# Altium PCB PCB1.PcbDoc
Units mm, origin at the board's own origin, x right, y up, seen from the top; angles counter-clockwise.
Board outline 97.28 x 102.87 mm, 2 copper layers (Top Layer, Bottom Layer); 66 components, 43 nets, 307 pads, 25 vias.
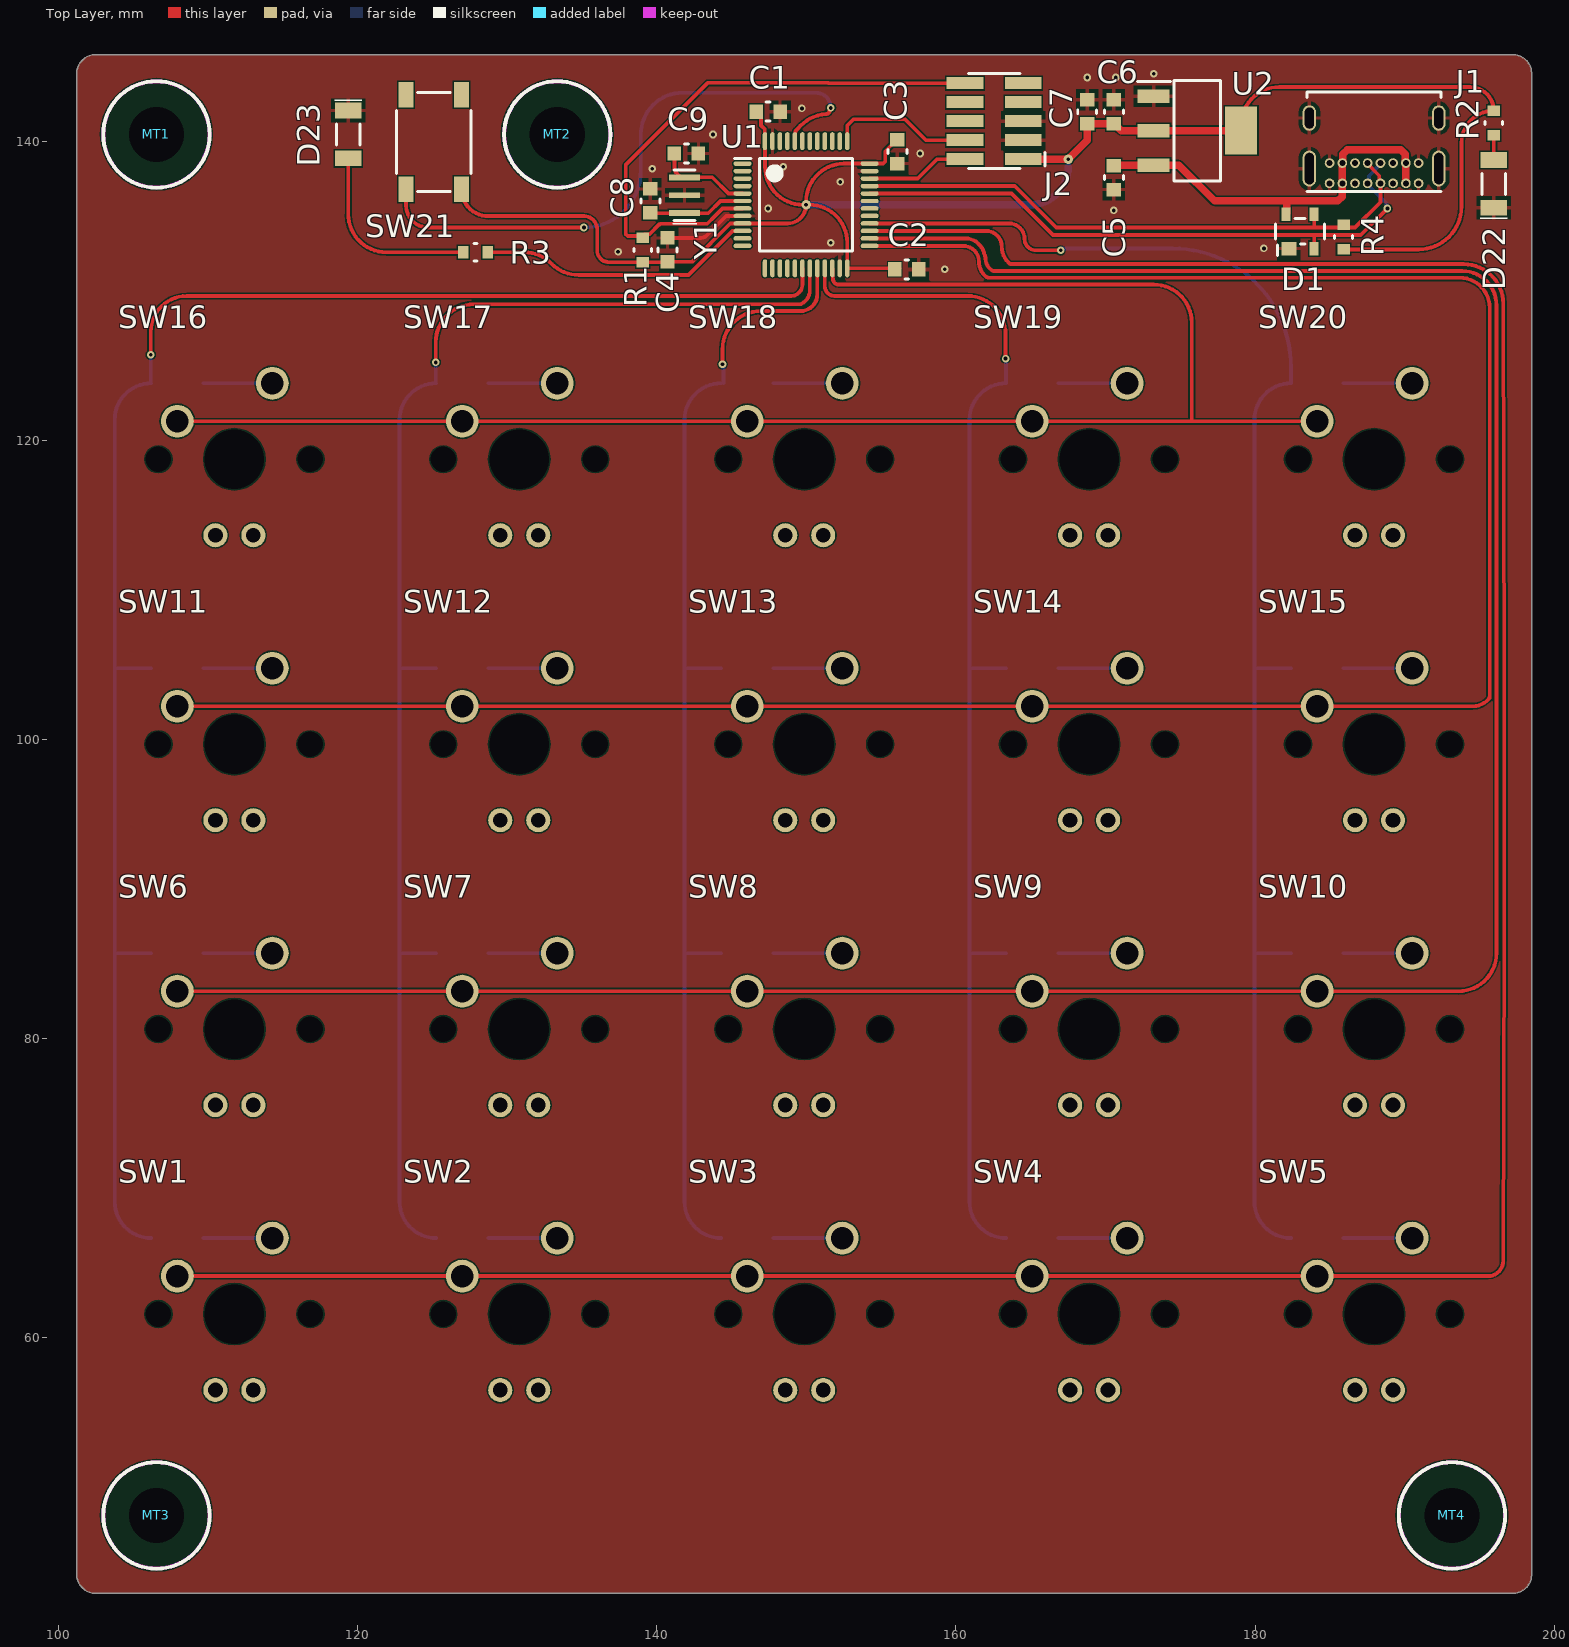
[diagram p0: Top Layer view]
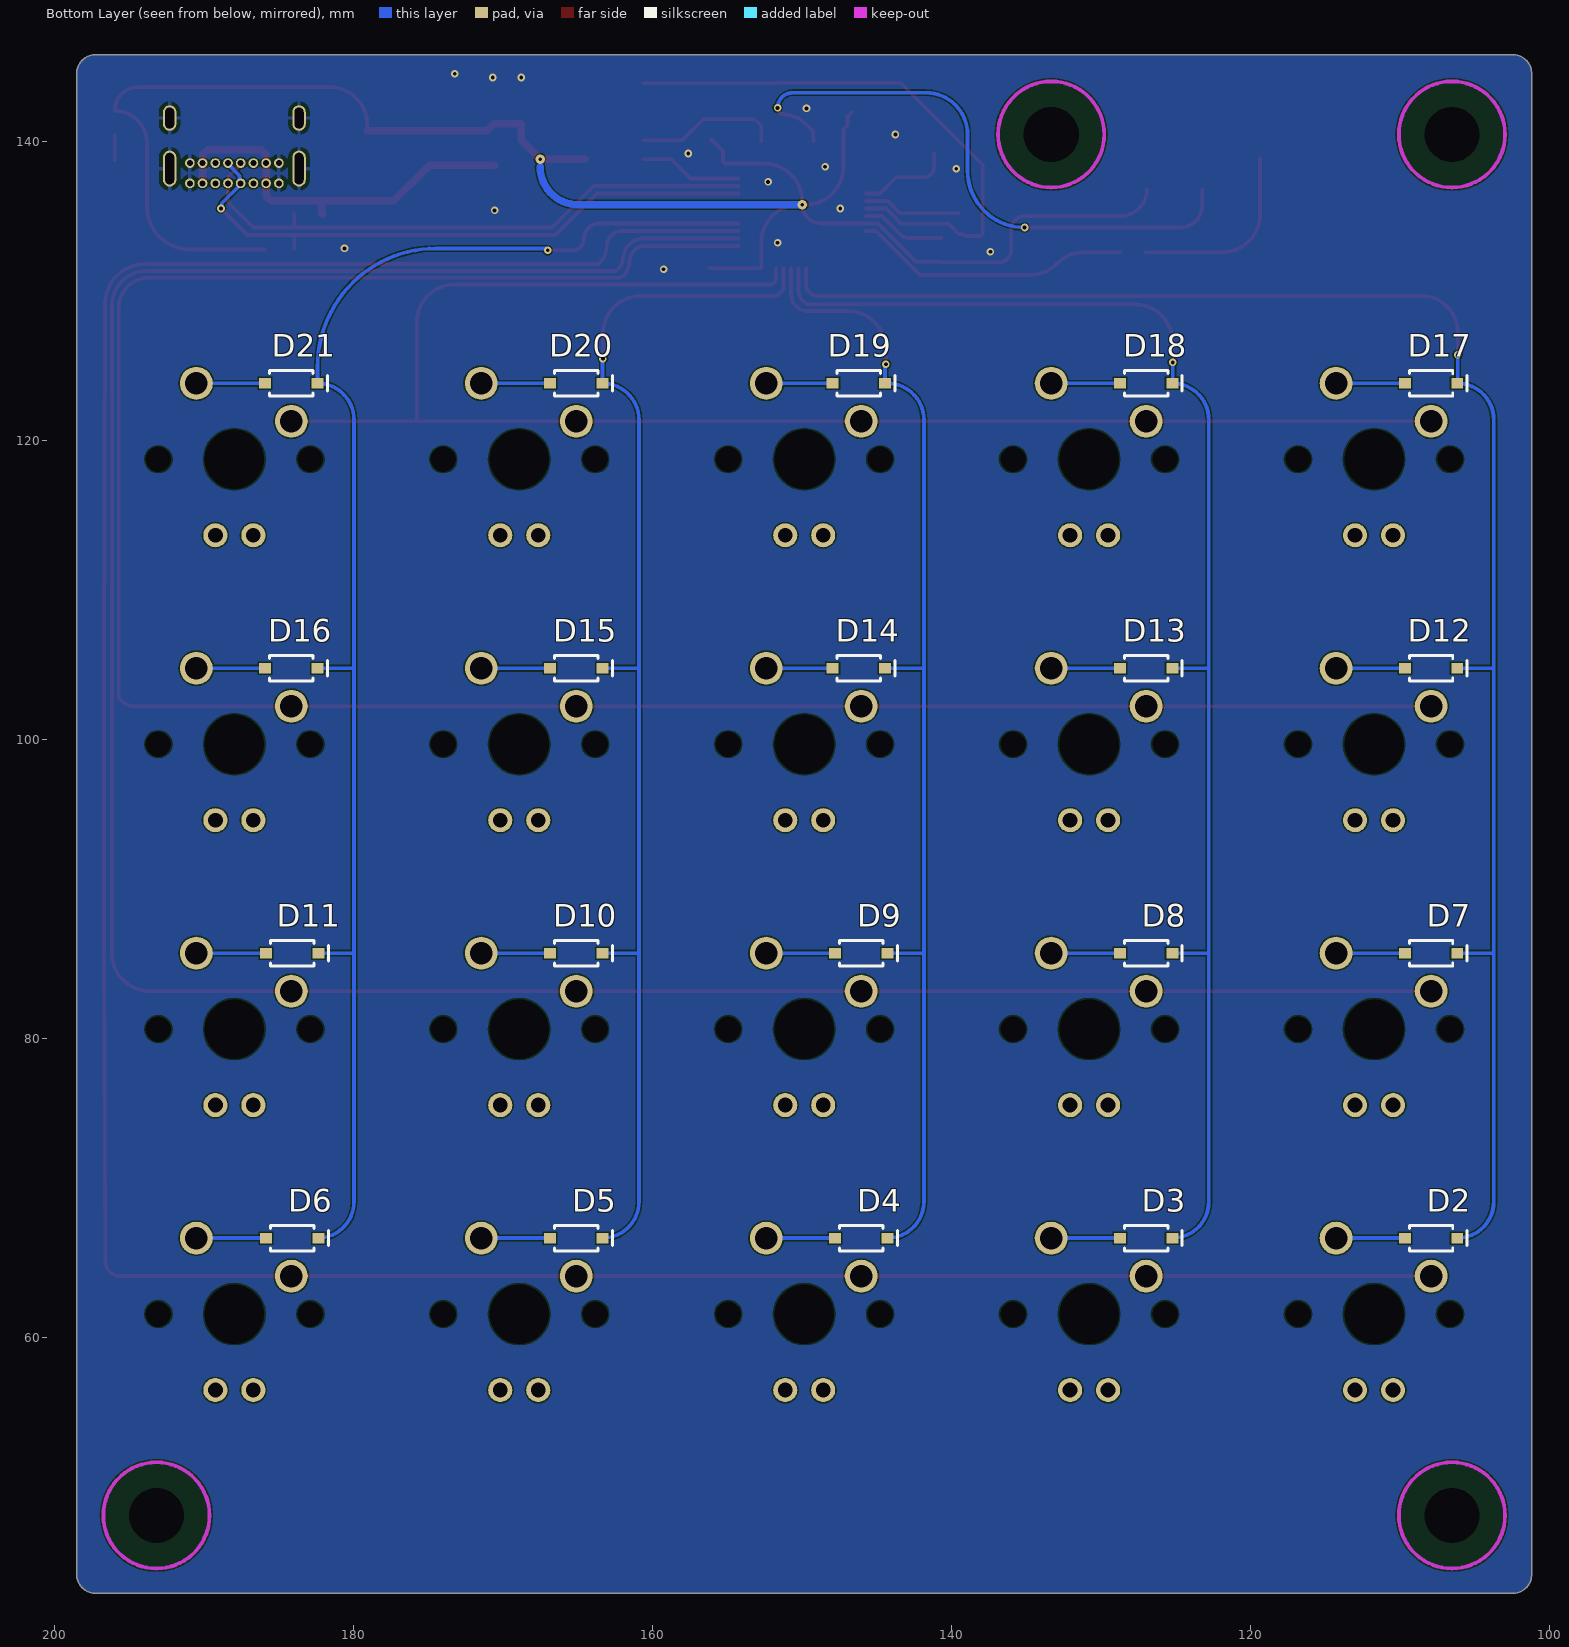
[diagram p1: Bottom Layer view, seen from below]
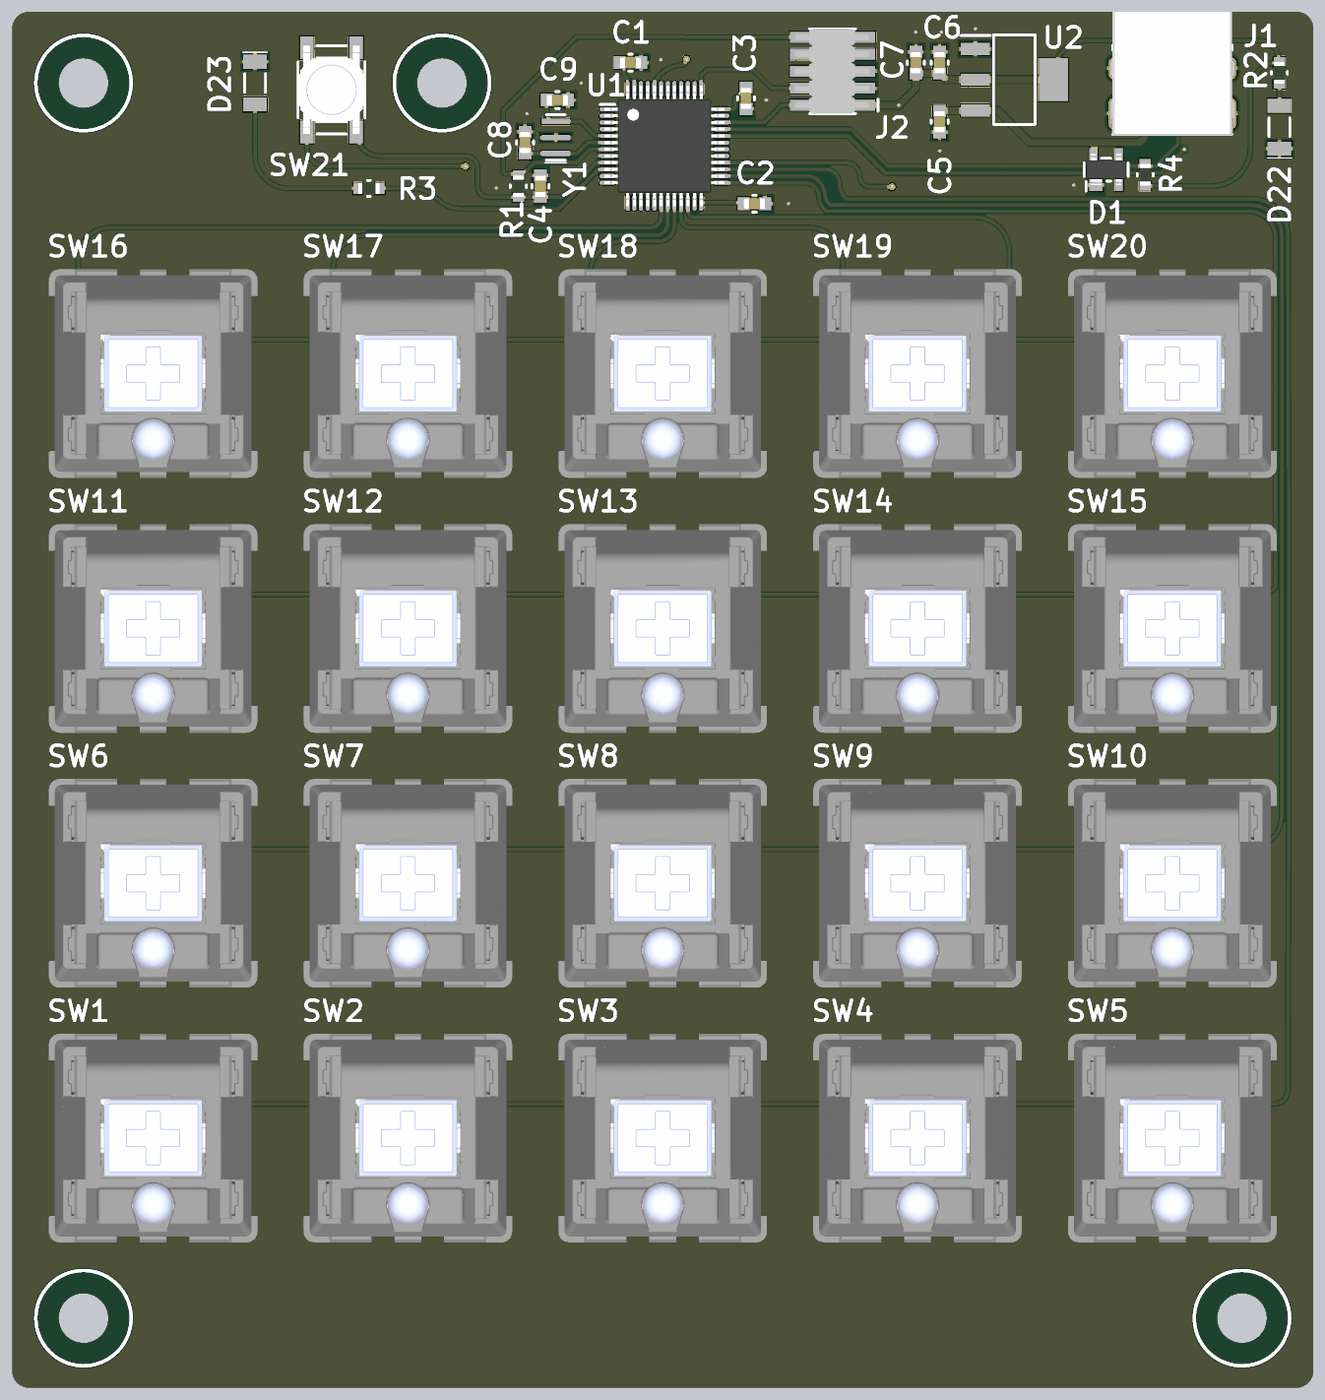
[diagram p2: 3D render of the assembled board from above, using the file's embedded part models]

## Layer stack, top to bottom
Top Solder: solder mask 0.0102, Solder Resist, Dk 3.5
Top Layer: signal copper 0.0356
Dielectric 1: dielectric 0.32, FR-4, Dk 4.8
Bottom Layer: signal copper 0.0356
Bottom Solder: solder mask 0.0102, Solder Resist, Dk 3.5

## Board outline
101.219,44.196 ccw(c102.489,44.196) 102.489,42.926 197.231,42.926 ccw(c197.231,44.196) 198.501,44.196 198.501,52.324 198.501,144.526 ccw(c197.231,144.526) 197.231,145.796 102.489,145.796 ccw(c102.489,144.526) 101.219,144.526 101.219,52.324

## Design rules (kind name [scope] priority, off if disabled: settings)
Clearance [All] p1: gap=0.089 ignorepadtopadclearanceinfootprint=FALSE
DiffPairsRouting [All] p1: maxlimit=0.254 minlimit=0.203 mostfreqgap=0.254 toplayer_minwidth=0.254 toplayer_maxwidth=0.381 toplayer_prefwidth=0.254 bottomlayer_minwidth=0.254 bottomlayer_maxwidth=0.381 bottomlayer_prefwidth=0.254 maxuncoupledlength=12.7
HoleSize [All] p1: absolutevalues=TRUE maxlimit=100 minlimit=0.2 maxpercent=80.000 minpercent=20.000
PolygonConnect PolygonConnect_Via [IsVia] p1: connectstyle=Direct reliefconductorwidth=0.254 reliefentries=4 polygonreliefangle="90 Angle" airgapwidth=0.254
PolygonConnect [All] p2: connectstyle=Relief reliefconductorwidth=0.254 reliefentries=4 polygonreliefangle="90 Angle" airgapwidth=0.254
RoutingVias [All] p1: holewidth=0.254 width=0.508 viastyle="Through Hole" minholewidth=0.254 minwidth=0.508 maxholewidth=0.254 maxwidth=0.508
SolderMaskExpansion [All] p1: expansion=0.102 istentingtop=FALSE
Width [All] p1: maxlimit=10 minlimit=0.089 preferedwidth=0.254
28 further rules are at their usual default settings.

## Classes and differential pairs
differential pair USBD: +USBD_P -USBD_N

## Components (designator, comment, footprint, x,y, rotation, side; value= is the part's Value field where it differs from the comment)
C1 "Generic CAPC 0603 0.1µF 25V ±10% X7R" CAPC_0603(1.6X0.8)_N 147.447,141.986 r0 top value=0.1µF
C2 "Generic CAPC 0603 0.1µF 25V ±10% X7R" CAPC_0603(1.6X0.8)_N 156.718,131.445 r0 top value=0.1µF
C3 "Generic CAPC 0603 0.1µF 25V ±10% X7R" CAPC_0603(1.6X0.8)_N 156.083,139.319 r270 top value=0.1µF
C4 "Generic CAPC 0603 0.1µF 25V ±10% X7R" CAPC_0603(1.6X0.8)_N 140.716,132.746 r90 top value=0.1µF
C5 "Generic CAPC 0603 0.1µF 25V ±10% X7R" CAPC_0603(1.6X0.8)_N 170.561,137.579 r270 top value=0.1µF
C6 "Generic CAPC 0603 0.1µF 25V ±10% X7R" CAPC_0603(1.6X0.8)_N 170.561,141.986 r90 top value=0.1µF
C7 "Generic CAPC 0603 10µF 6.3V ±20% X5R" CAPC_0603(1.6X0.8)_N 168.783,141.986 r90 top value=10µF
C8 "Generic CAPC 0603 22pF 250V ±2% C0G/NP0" CAPC_0603(1.6X0.8)_N 139.573,136.017 r90 top value=22pF
C9 "Generic CAPC 0603 22pF 250V ±2% C0G/NP0" CAPC_0603(1.6X0.8)_N 141.986,139.192 r0 top value=22pF
D1 "TVS DIODE 5.5VWM SOT143B" NXP_SOT143B_N 183.007,133.985 r90 top
D2 "DIODE GEN PURP 100V 300MA SOD123" 1N4148W-7-F_N 107.95,66.675 r0 bottom
D3 "DIODE GEN PURP 100V 300MA SOD123" 1N4148W-7-F_N 127,66.675 r0 bottom
D4 "DIODE GEN PURP 100V 300MA SOD123" 1N4148W-7-F_N 146.05,66.675 r0 bottom
D5 "DIODE GEN PURP 100V 300MA SOD123" 1N4148W-7-F_N 165.1,66.675 r0 bottom
D6 "DIODE GEN PURP 100V 300MA SOD123" 1N4148W-7-F_N 184.089,66.675 r0 bottom
D7 "DIODE GEN PURP 100V 300MA SOD123" 1N4148W-7-F_N 107.95,85.725 r0 bottom
D8 "DIODE GEN PURP 100V 300MA SOD123" 1N4148W-7-F_N 127,85.725 r0 bottom
D9 "DIODE GEN PURP 100V 300MA SOD123" 1N4148W-7-F_N 146.05,85.725 r0 bottom
D10 "DIODE GEN PURP 100V 300MA SOD123" 1N4148W-7-F_N 165.1,85.725 r0 bottom
D11 "DIODE GEN PURP 100V 300MA SOD123" 1N4148W-7-F_N 184.089,85.725 r0 bottom
D12 "DIODE GEN PURP 100V 300MA SOD123" 1N4148W-7-F_N 107.95,104.775 r0 bottom
D13 "DIODE GEN PURP 100V 300MA SOD123" 1N4148W-7-F_N 127,104.775 r0 bottom
D14 "DIODE GEN PURP 100V 300MA SOD123" 1N4148W-7-F_N 146.205,104.775 r0 bottom
D15 "DIODE GEN PURP 100V 300MA SOD123" 1N4148W-7-F_N 165.1,104.775 r0 bottom
D16 "DIODE GEN PURP 100V 300MA SOD123" 1N4148W-7-F_N 184.15,104.775 r0 bottom
D17 "DIODE GEN PURP 100V 300MA SOD123" 1N4148W-7-F_N 107.95,123.825 r0 bottom
D18 "DIODE GEN PURP 100V 300MA SOD123" 1N4148W-7-F_N 127,123.825 r0 bottom
D19 "DIODE GEN PURP 100V 300MA SOD123" 1N4148W-7-F_N 146.205,123.825 r0 bottom
D20 "DIODE GEN PURP 100V 300MA SOD123" 1N4148W-7-F_N 165.1,123.825 r0 bottom
D21 "DIODE GEN PURP 100V 300MA SOD123" 1N4148W-7-F_N 184.15,123.825 r0 bottom
D22 "LED 468NM BLUE CLEAR 1206 SMD" LTST-C150TBKT_N 195.961,137.16 r90 top
D23 "LED 468NM BLUE CLEAR 1206 SMD" LTST-C150TBKT_N 119.38,140.462 r270 top
J1 "USB4085-GF-A" GCT_USB4085-GF-A_MN 187.96,141.224 r180 top
J2 "CONN HEADER 10POS DL UNSHRD SMD" 20021121-00010C4LF 162.56,141.351 r90 top
MT1 "4-40 Mounting hole NPTH" 440LNPTH 106.553,140.462 r0 top
MT2 "4-40 Mounting hole NPTH" 440LNPTH 133.35,140.462 r0 top
MT3 "4-40 Mounting hole NPTH" 440LNPTH 106.553,48.133 r0 top
MT4 "4-40 Mounting hole NPTH" 440LNPTH 193.167,48.133 r0 top
R1 "Generic RES 0603 10K 0.1W 5%" RESC_0603(1.6X0.8)_N 139.065,132.746 r270 top value=10K
R2 "Generic RES 0603 470 0.1W 5%" RESC_0603(1.6X0.8)_N 195.961,141.224 r90 top value=470
R3 "Generic RES 0603 470 0.1W 5%" RESC_0603(1.6X0.8)_N 127.889,132.588 r0 top value=470
R4 "Generic RES 0603 1.5K 0.1W 5%" RESC_0603(1.6X0.8)_N 185.928,133.604 r270 top value=1.5K
SW1 "MX1A-E1NW" CHRY_MXXX-XXXW_MA 111.76,61.595 r0 top
SW2 "MX1A-E1NW" CHRY_MXXX-XXXW_MA 130.81,61.595 r0 top
SW3 "MX1A-E1NW" CHRY_MXXX-XXXW_MA 149.86,61.595 r0 top
SW4 "MX1A-E1NW" CHRY_MXXX-XXXW_MA 168.91,61.595 r0 top
SW5 "MX1A-E1NW" CHRY_MXXX-XXXW_MA 187.96,61.595 r0 top
SW6 "MX1A-E1NW" CHRY_MXXX-XXXW_MA 111.76,80.645 r0 top
SW7 "MX1A-E1NW" CHRY_MXXX-XXXW_MA 130.81,80.645 r0 top
SW8 "MX1A-E1NW" CHRY_MXXX-XXXW_MA 149.86,80.645 r0 top
SW9 "MX1A-E1NW" CHRY_MXXX-XXXW_MA 168.91,80.645 r0 top
SW10 "MX1A-E1NW" CHRY_MXXX-XXXW_MA 187.96,80.645 r0 top
SW11 "MX1A-E1NW" CHRY_MXXX-XXXW_MA 111.76,99.695 r0 top
SW12 "MX1A-E1NW" CHRY_MXXX-XXXW_MA 130.81,99.695 r0 top
SW13 "MX1A-E1NW" CHRY_MXXX-XXXW_MA 149.86,99.695 r0 top
SW14 "MX1A-E1NW" CHRY_MXXX-XXXW_MA 168.91,99.695 r0 top
SW15 "MX1A-E1NW" CHRY_MXXX-XXXW_MA 187.96,99.695 r0 top
SW16 "MX1A-E1NW" CHRY_MXXX-XXXW_MA 111.76,118.745 r0 top
SW17 "MX1A-E1NW" CHRY_MXXX-XXXW_MA 130.81,118.745 r0 top
SW18 "MX1A-E1NW" CHRY_MXXX-XXXW_MA 149.86,118.745 r0 top
SW19 "MX1A-E1NW" CHRY_MXXX-XXXW_MA 168.91,118.745 r0 top
SW20 "MX1A-E1NW" CHRY_MXXX-XXXW_MA 187.96,118.745 r0 top
SW21 "SWITCH TACTILE SPST-NO 0.05A 12V" TL3342F160QG-TR 125.095,139.954 r90 top
U1 "32BIT, CORTEX-M4, 72MHZ, LQFP-48" ST_LQFP-48-7x7x1.4_MN 149.987,135.763 r0 top
U2 "IC REG LDO 3.3V 0.8A SOT223" TI_DCY-R-PDSO-G4_N 176.149,140.716 r0 top
Y1 "CER RESONATOR 8.00MHZ SMD" CSTCE8M00G55-R0 141.859,135.198 r270 top

## Footprints (in the part's own frame and the unit in brackets; to place one, negate y for a bottom-side part, rotate by r counter-clockwise, add the part's x,y. Pads: shape width x height; smd on the part's side, far side on the other; paste and mask are expansions set on the pad)
1N4148W-7-F_N [mm] "SODFL, 2-Leads, Body 1.55x3.70mm, IPC Medium Density, Dimensions obtained from component datasheet"
  rect 0.8x0.7 smd: 1(-1.75,0) 2(1.75,0)
  silkscreen extent -2.41,-0.85 1.45,0.85, body extent -1.42,-0.85 1.43,0.85, height 1.45
440LNPTH [mm] "#4-40 Loose NPTH"
  rect 0x0 hole 3.7 unplated: 0(0,0)
  Keep-Out Layer circle w0.254: c0,0 r3.55
  silkscreen extent -3.56,-3.56 3.56,3.56
20021121-00010C4LF [mm] "10 pin 50mil con"
  rect 0.81x2.45 smd: 1(-2.54,-1.95) 2(-2.54,1.95) 3(-1.27,-1.95) 4(-1.27,1.95) 5(0,-1.95) 6(0,1.95) 7(1.27,-1.95) 8(1.27,1.95) 9(2.54,-1.95) 10(2.54,1.95)
  silkscreen extent -3.17,-3.4 3.17,1.72, body extent -3.17,-2.71 3.17,2.79, height 4.48
CAPC_0603(1.6X0.8)_N [mm] "Chip Capacitor, 0603 (1.6X0.8mm), N density, Chip dimensions based on Vishay VJ Commercial series"
  rect 0.9x0.95 smd: 1(-0.8,0) 2(0.8,0)
  silkscreen extent -0.13,-0.64 0.13,0.64, body extent -0.8,-0.4 0.8,0.4, height 0.92
CHRY_MXXX-XXXW_MA [mm]
  round 0 hole 1.702 unplated: 0(-5.08,0) 0(5.08,0)
  round 0 hole 3.988 unplated: 0(0,0)
  round 2.2 hole 1.499: 1(-3.81,2.54) 2(2.54,5.08)
  round 1.61 hole 0.991: 3(-1.27,-5.08) 4(1.27,-5.08)
  body extent -7.8,-7.8 7.8,7.8, height 15.51
CSTCE8M00G55-R0 [mm] "Footprint from manufacturer's recommendation"
  rect 0.4x2.1 smd: 1(0,0) 2(-1.2,0) 3(-2.4,0)
  silkscreen extent -2.9,-0.8 0.7,0.8, body extent -2.87,-0.72 0.47,0.72, height 0.8
GCT_USB4085-GF-A_MN [mm]
  round 0.65 hole 0.4: 1(-2.975,4.025) 2(-2.125,4.025) 3(-1.275,4.025) 4(-0.425,4.025) 5(0.425,4.025) 6(1.275,4.025) 7(2.125,4.025) 8(2.975,4.025) 9(-2.975,2.675) 10(-2.125,2.675) 11(-1.275,2.675) 12(-0.425,2.675) 13(0.425,2.675) 14(1.275,2.675) 15(2.125,2.675) 16(2.975,2.675)
  oval 0.9x2.4 hole 0.6 slot 2.1 at 90 deg: 17(-4.325,3.045) 18(4.325,3.045)
  oval 0.9x1.7 hole 0.6 slot 1.4 at 90 deg: 19(-4.325,-0.335) 20(4.325,-0.335)
  silkscreen extent -4.47,-2.07 4.47,4.58, body extent -4.51,-4.56 4.52,4.61, height 3.46
LTST-C150TBKT_N [mm] "Chip Diode, 2-Leads, Body 3.20x1.60mm, IPC Medium Density"
  rect 1.05x1.75 smd: 1(-1.6,0) 2(1.6,0)
  silkscreen extent -2.3,-0.9 0.7,0.9, body extent -1.55,-0.85 1.55,0.85, height 1.1
NXP_SOT143B_N [mm] "SOT143, 4-Leads, Body 2.90x2.30mm, Pitch 1.90mm, IPC Medium Density, body dimensions from package drawing"
  rect 0.9x1 smd: 1(-1.15,0.75)
  rect 0.9x0.6 smd: 2(-1.15,-0.95) 3(1.15,-0.95) 4(1.15,0.95)
  silkscreen extent -1.6,-1.65 0.85,1.65, body extent -1.15,-1.5 1.15,1.5, height 1.1
RESC_0603(1.6X0.8)_N [mm] "Chip Resistor, 0603 (1.6X0.8mm), N density, Chip dimensions based on Panasonic ERJ series"
  rect 0.7x0.85 smd: 1(-0.825,0) 2(0.825,0)
  silkscreen extent -0.1,-0.6 0.1,0.6, body extent -0.8,-0.4 0.8,0.4, height 0.55
ST_LQFP-48-7x7x1.4_MN [mm] "TSQFP, 48-Leads, Body 7.00x7.00mm, Pitch 0.50mm, IPC Medium Density, body and pad dimensions from datasheet"
  oval 1.2x0.3 smd: 1(-4.25,2.75) 2(-4.25,2.25) 3(-4.25,1.75) 4(-4.25,1.25) 5(-4.25,0.75) 6(-4.25,0.25) 7(-4.25,-0.25) 8(-4.25,-0.75) 9(-4.25,-1.25) 10(-4.25,-1.75) 11(-4.25,-2.25) 12(-4.25,-2.75) 25(4.25,-2.75) 26(4.25,-2.25) 27(4.25,-1.75) 28(4.25,-1.25) 29(4.25,-0.75) 30(4.25,-0.25) 31(4.25,0.25) 32(4.25,0.75) 33(4.25,1.25) 34(4.25,1.75) 35(4.25,2.25) 36(4.25,2.75)
  oval 0.3x1.2 smd: 13(-2.75,-4.25) 14(-2.25,-4.25) 15(-1.75,-4.25) 16(-1.25,-4.25) 17(-0.75,-4.25) 18(-0.25,-4.25) 19(0.25,-4.25) 20(0.75,-4.25) 21(1.25,-4.25) 22(1.75,-4.25) 23(2.25,-4.25) 24(2.75,-4.25) 37(2.75,4.25) 38(2.25,4.25) 39(1.75,4.25) 40(1.25,4.25) 41(0.75,4.25) 42(0.25,4.25) 43(-0.25,4.25) 44(-0.75,4.25) 45(-1.25,4.25) 46(-1.75,4.25) 47(-2.25,4.25) 48(-2.75,4.25)
  silkscreen extent -4.8,-3.1 3.1,3.1, body extent -4.5,-4.5 4.5,4.5, height 1.6
TI_DCY-R-PDSO-G4_N [mm] "SOT223, 4-Leads, Body 6.50x7.00mm (avg), Pitch 2.30mm, IPC Medium Density, body dimensions from datasheet"
  rect 2.15x0.9 smd: 1(-2.925,2.3) 2(-2.925,0) 3(-2.925,-2.3)
  rect 2.15x3.2 smd: 4(2.925,0)
  silkscreen extent -4,-3.35 1.55,3.35, body extent -1.85,-3.35 1.85,3.35, height 1.8
TL3342F160QG-TR [mm]
  rect 1.7x1 smd: 1(-3.15,-1.85) 2(3.15,-1.85) 3(-3.15,1.85) 4(3.15,1.85)
  silkscreen extent -3.3,-2.5 3.3,2.5, body extent -3.3,-2.5 3.3,2.5, height 1.46

## Part data
C1 C2 C3 C4 C5 C6: library part SFE-CAPC-0603-0.1µF-25V-±10%-X7R, "Generic Capacitor", capacitance=0.0000001, Case-IEC=0603, Manufacturer=Generic, Tolerance=±10%, Voltage=25V, DesignID=SFE-CAPC-0603-0.1µF-25V-±10%-X7R, Manufacturer Part Number=SFE-CAPC-0603-0.1µF-25V-±10%-X7R
C7: library part SFE-CAPC-0603-10µF-6.3V-±20%-X5R, "Generic Capacitor", capacitance=0.00001, Case-IEC=0603, Manufacturer=Generic, Tolerance=±20%, Voltage=6.3V, DesignID=SFE-CAPC-0603-10µF-6.3V-±20%-X5R, Manufacturer Part Number=SFE-CAPC-0603-10µF-6.3V-±20%-X5R
C8 C9: library part SFE-CAPC-0603-22pF-250V-±2%-C0G/NP0, "Generic Capacitor", capacitance=0.000000000022, Case-IEC=0603, Manufacturer=Generic, Tolerance=±2%, Voltage=250V, DesignID=SFE-CAPC-0603-22pF-250V-±2%-C0G/NP0, Manufacturer Part Number=SFE-CAPC-0603-22pF-250V-±2%-C0G/NP0
D1: library part PRTR5V0U2X,215, Capacitance @ Frequency="1pF @ 1MHz", Current - Peak Pulse (10/1000µs)=-, Manufacturer="NXP Semiconductors", Operating Temperature="-40°C ~ 85°C (TA)", Package / Case="TO-253-4, TO-253AA", Power Line Protection=Yes, SafariPartNumber="15 27314RC", Supplier Device Package=SOT-143B, Supplier Part Number 1=568-4140-1-ND, Voltage - Breakdown (Min)=6V, Voltage - Reverse Standoff (Typ)="5.5V (Max)", Applications="General Purpose", Bidirectional Channels=2, Category="Circuit Protection", ComponentLink1Description=Datasheet, ComponentLink1URL=https://assets.nexperia.com/documents/data-sheet/PRTR5V0U2X.pdf, DesignID=PRTR5V0U2X,215, Manufacturer Part Number=PRTR5V0U2X,215, Mounting Type="Surface Mount", Packaging="Cut Tape (CT)", Power - Peak Pulse=-, Pricing 1="1=0.57, 10=0.477, 25=0.418, 100=0.3578, 250=0.31036, 500=0.26286, 1000=0.20265 (USD)", RoHS="RoHS Compliant", Stock 1=19762, Supplier 1=Digi-Key, Type="Steering (Rail to Rail)", Unidirectional Channels=-, Voltage - Clamping (Max) @ Ipp=-
D2 D3 D4 D5 D6 D7 D8 D9 D10 D11 D12 D13 D14 D15 D16 D17 D18 D19 D20 D21: library part 1N4148W-7-F, Capacitance @ Vr, F="2pF @ 0V, 1MHz", Current - Average Rectified (Io)="300mA (DC)", Current - Reverse Leakage @ Vr="1µA @ 75V", Manufacturer="Diodes Incorporated", Operating Temperature - Junction="-65°C ~ 150°C", Package / Case=SOD-123, SafariPartNumber="15 15821RC", Supplier Part Number 1=1N4148W-FDICT-ND, Voltage - DC Reverse (Vr) (Max)=100V, Voltage - Forward (Vf) (Max) @ If="1.25V @ 150mA", Category="Discrete Semiconductor Products", ComponentLink1Description=http://www.diodes.com/_files/datasheets/ds30086.pdf, ComponentLink1URL=http://www.diodes.com/_files/datasheets/ds30086.pdf, DesignID=1N4148W-7-F, Diode Type=Standard, Manufacturer Part Number=1N4148W-7-F, Mounting Type="Surface Mount", Packaging="Cut Tape (CT)", Part Status=Active, Pricing 1="1=0.16, 10=0.149, 100=0.081, 500=0.04986, 1000=0.03399 (USD)", Reverse Recovery Time (trr)=4ns, RoHS="RoHS Compliant", Speed="Small Signal =< 200mA (Io), Any Speed", Stock 1=649808, Supplier 1=Digi-Key, Supplier Device Package=SOD-123
D22 D23: library part LTST-C150TBKT, Color=Blue, Current - Test=20mA, Luminous Flux @ Current - Test=-, Manufacturer="Lite-On Inc", Millicandela Rating=104mcd, Package / Case="1206 (3216 Metric)", SafariPartNumber="15 25012RC", Supplier Part Number 1=160-1643-1-ND, Voltage - Forward (Vf) (Typ)=3.3V, Category=Optoelectronics, ComponentLink1Description=http://optoelectronics.liteon.com/upload/download/DS22-2000-026/S_110_LTST-C150TBKT(0630).pdf, ComponentLink1URL=http://optoelectronics.liteon.com/upload/download/DS22-2000-026/S_110_LTST-C150TBKT(0630).pdf, DesignID=LTST-C150TBKT, Height=1.10mm, Lens Style/Size="Rectangle with Flat Top, 2.06mm x 1.6mm", Lens Type=Clear, Manufacturer Part Number=LTST-C150TBKT, Mounting Type="Surface Mount", Packaging="Cut Tape (CT)", Pricing 1="1=0.5, 10=0.369, 100=0.1956, 250=0.13836, 500=0.11808, 1000=0.09225 (USD)", RoHS="RoHS Compliant", Size / Dimension="3.20mm L x 1.60mm W", Stock 1=267579, Supplier 1=Digi-Key, Viewing Angle=130°, Wavelength - Dominant=470nm, Wavelength - Peak=468nm
J1: "USB4085 Series 20 V PCB Top Mount USB 2.0 Type C Receptacle", Manufacturer 1="Global Connector Technology", Supplier Part Number 1=72AC6905, ComponentLink1Description=https://datasheet.ciiva.com/71788/2674755-71788146.pdf?src-supplier=Element14, ComponentLink1URL=https://datasheet.ciiva.com/71788/2674755-71788146.pdf?src-supplier=Element14, ComponentLink2Description=https://datasheet.ciiva.com/71788/usb4085-71788147.pdf?src-supplier=Digi-Key, ComponentLink2URL=https://datasheet.ciiva.com/71788/usb4085-71788147.pdf?src-supplier=Digi-Key, Contact Material="Copper Alloy", Contact Plating=Gold, Gender=Receptacle, Manufacturer Part Number 1=USB4085-GF-A, Number of Positions=16, Orientation="Right Angle", Pricing 1="1=1.38000, 10=1.23000, 25=1.15000, 50=1.06000, 100=0.91100, 250=0.83700, 700=0.77300, 1400=0.72600 (USD)", RoHS=No, Supplier 1=Newark, USB Standard="USB 2.0"
J2: library part 20021121-00010C4LF, Color=Black, Manufacturer=FCI, Supplier Part Number 1=609-3695-1-ND, Category="Connectors, Interconnects", ComponentLink1Description=http://portal.fciconnect.com/Comergent//fci/drawing/20021121.pdf, ComponentLink1URL=http://portal.fciconnect.com/Comergent//fci/drawing/20021121.pdf, Connector Type="Header, Unshrouded", Contact Finish=Gold, Contact Finish Thickness="10µin (0.25µm)", Contact Mating Length="0.120\" (3.05mm)", Contact Type="Male Pin", DesignID=20021121-00010C4LF, Fastening Type=-, Features=-, Manufacturer Part Number=20021121-00010C4LF, Mounting Type="Surface Mount", Number of Positions=10, Number of Positions Loaded=All, Number of Rows=2, Packaging="Cut Tape (CT)", Pitch="0.050\" (1.27mm)", Pricing 1="1=0.8, 10=0.701, 25=0.66, 50=0.6326, 100=0.605, 250=0.55 (USD)", RoHS="RoHS Compliant", Row Spacing="0.050\" (1.27mm)", Stock 1=32337, Supplier 1=Digi-Key, Termination=Solder
MT1 MT2 MT3 MT4: library part 4-40_NPTH, DesignID=4-40_NPTH, Manufacturer Part Number=4-40_NPTH
R1: library part SFE-RES-0603-10K-0.1W-5%, "Generic Resistor", Case-IEC=0603, Manufacturer=Generic, Power=0.1W, Resistance=10000, Temperature Coefficient=PPM, Tolerance=5%, ValueString=10K5%, DesignID=SFE-RES-0603-10K-0.1W-5%, Manufacturer Part Number=SFE-RES-0603-10K-0.1W-5%
R2 R3: library part SFE-RES-0603-470-0.1W-5%, "Generic Resistor", Case-IEC=0603, Manufacturer=Generic, Power=0.1W, Resistance=470, Temperature Coefficient=PPM, Tolerance=5%, ValueString=4705%, DesignID=SFE-RES-0603-470-0.1W-5%, Manufacturer Part Number=SFE-RES-0603-470-0.1W-5%
R4: library part SFE-RES-0603-1.5K-0.1W-5%, "Generic Resistor", Case-IEC=0603, Manufacturer=Generic, Power=0.1W, Resistance=1500, Temperature Coefficient=PPM, Tolerance=5%, ValueString=1.5K5%, DesignID=SFE-RES-0603-1.5K-0.1W-5%, Manufacturer Part Number=SFE-RES-0603-1.5K-0.1W-5%
SW1 SW2 SW3 SW4 SW5 SW6 SW7 SW8 SW9 SW10 SW11 SW12 SW13 SW14 SW15 SW16 SW17 SW18 SW19 SW20: "SWITCH PUSH SPST-NO 0.01A 12V", Contact Current Rating=10mA, Contact Resistance=200mR, Flammability Rating="UL94 HB", Manufacturer 1=Cherry, Max Operating Temperature=70°C, Max Voltage Rating (AC)=12V, Min Operating Temperature=-10°C, Operating Force=0.5N, Package Quantity=1000, Supplier Part Number 1=CH197-ND, Actuator Length=3.6mm, ComponentLink1Description=https://datasheet.ciiva.com/2869/mx20series-2869568.pdf?src-supplier=Digi-Key, ComponentLink1URL=https://datasheet.ciiva.com/2869/mx20series-2869568.pdf?src-supplier=Digi-Key, ComponentLink2Description=https://datasheet.ciiva.com/5259/mx-cat-216303-5259204.pdf?src-supplier=Mouser, ComponentLink2URL=https://datasheet.ciiva.com/5259/mx-cat-216303-5259204.pdf?src-supplier=Mouser, Contact Material=Gold,Silver, Contact Plating=Gold, Current Rating=10mA, Electrical Life=20000000Cycles, Housing Material=Thermoplastic, Lead Free="Lead Free", Length=15.6mm, Manufacturer Part Number 1=MX1A-E1NW, Max Current Rating=10mA, Max Voltage Rating (DC)=12V, Mechanical Life=20000000Cycles, Mount="Through Hole", Number of Terminals=2, Orientation=Straight, Packaging=Bulk, Pricing 1="1=0.90000, 10=0.84000, 25=0.80000, 50=0.76000, 100=0.74000, 250=0.72000, 500=0.68000, 1000=0.64000, 5000=0.54000 (USD)", RoHS=Yes, Row Spacing=2.54mm, Stock 1=7477, Supplier 1=Digi-Key, Switch Function=Off-Mom, Terminal Pitch=6.35mm, Termination="PC Pin", Throw Configuration=SPST, Voltage Rating (AC)=12V, Voltage Rating (DC)=12V, Width=15.6mm
SW21: library part TL3342F160QG/TR, Contact Rating @ Voltage="0.05A @ 12VDC", Illumination Type, Color=-, Manufacturer=E-Switch, Operating Force=160gf, Supplier Part Number 1=EG2531CT-ND, Actuator Height off PCB, from Pins=1.54mm, Actuator Material="Polyphenylene Sulfide (PPS)", Actuator Orientation="Top Actuated", Actuator Type=Standard, Category=Switches, Circuit=SPST-NO, ComponentLink1Description=https://www.e-switch.com/system/asset/product_line/data_sheet/165/TL3342.pdf, ComponentLink1URL=https://www.e-switch.com/system/asset/product_line/data_sheet/165/TL3342.pdf, DesignID=TL3342F160QG/TR, Features=-, Illumination=Non-Illuminated, Illumination Voltage (Nominal)=-, Ingress Protection=-, Manufacturer Part Number=TL3342F160QG/TR, Mechanical Life="100,000 Cycles", Mounting Type="Surface Mount", Operating Temperature=-, Outline="4.90mm x 4.90mm", Packaging="Cut Tape (CT)", Pricing 1="1=0.63, 10=0.603, 25=0.5916, 50=0.5694, 100=0.4913, 250=0.4466, 500=0.42428, 1000=0.33495 (USD)", RoHS="RoHS Compliant", Stock 1=54320, Supplier 1=Digi-Key, Switch Function=Off-Mom, Switch Travel=-, Termination Style="Gull Wing"
U1: library part STM32F303CCT6, Case/Package=LQFP, Frequency=72MHz, Manufacturer="ST Micro", Manufacturer 1=STMicroelectronics, Max Operating Temperature=85°C, Max Supply Voltage=3.6V, Min Operating Temperature=-40°C, Min Supply Voltage=2V, Package Quantity=250, Supplier Part Number 1=497-13318-ND, ComponentLink1Description=https://datasheet.ciiva.com/14666/0900766b81171360-14666656.pdf?src-supplier=RSComponents, ComponentLink1URL=https://datasheet.ciiva.com/14666/0900766b81171360-14666656.pdf?src-supplier=RSComponents, ComponentLink2Description=https://datasheet.ciiva.com/8055/1831499-8055015.pdf?src-supplier=Element14, ComponentLink2URL=https://datasheet.ciiva.com/8055/1831499-8055015.pdf?src-supplier=Element14, Contact Plating=Gold, Core Architecture=ARM, Data Bus Width=32b, DesignID=STM32F303CCT6, Height=1.45mm, Interface=I2C,SPI,USB,CAN,IrDA,UART,USART,LIN,I2S, Lead Free="Lead Free", Length=10mm, Manufacturer Part Number=STM32F303CCT6, Manufacturer Part Number 1=STM32F303CCT6, Max Frequency=72MHz, Memory Size=256KB, Memory Type=FLASH, Number of ADC Channels=39, Number of I/Os=37, Number of I2C Channels=2, Number of Pins=48, Number of Programmable I/O=27, Number of SPI Channels=3, Number of Timers/Counters=10, Number of USB Channels=1, Oscillator Type=Internal, Packaging=Tray, Peripherals=POR,PWM,WDT,DMA, Pricing 1="1=5.94000, 10=5.33600, 100=4.37190, 500=3.72172, 1000=3.13880 (USD)", Radiation Hardening=No, RAM Size=40KB, REACH SVHC="No SVHC", RoHS=Yes, Stock 1=5656, Supplier 1=Digi-Key, Watchdog Timer=Yes, Width=7.2mm
U2: library part LM1117IMPX-3.3/NOPB, Current - Limit (Min)=800mA, Manufacturer="Texas Instruments", Operating Temperature="-40°C ~ 125°C", Package / Case="TO-261-4, TO-261AA", SafariPartNumber="15 24656RC", Supplier Device Package=SOT-223-4, Supplier Part Number 1=LM1117IMPX-3.3/NOPBCT-ND, Voltage - Dropout (Typical)="1.2V @ 800mA", Voltage - Input="Up to 15V", Voltage - Output=3.3V, Category="Integrated Circuits (ICs)", ComponentLink1Description=http://www.ti.com/lit/ds/symlink/lm1117.pdf, ComponentLink1URL=http://www.ti.com/lit/ds/symlink/lm1117.pdf, Current - Output=800mA, DesignID=LM1117IMPX-3.3/NOPB, Manufacturer Part Number=LM1117IMPX-3.3/NOPB, Mounting Type="Surface Mount", Number of Regulators=1, Packaging="Cut Tape (CT)", Pricing 1="1=1.04, 10=0.927, 100=0.7229, 500=0.5978, 1000=0.47275 (USD)", Regulator Topology="Positive Fixed", RoHS="RoHS Compliant", Stock 1=19906, Supplier 1=Digi-Key, Supplier 2=Mouser, Supplier 3=Newark, Supplier Part Number 2=926-LM1117IMPX33NOPB, Supplier Part Number 3=28X3413
Y1: library part CSTCE8M00G55-R0, capacitance=33pF, Frequency=8MHz, Frequency Stability=±0.2%, Frequency Tolerance=±0.5%, Manufacturer="Murata Electronics North America", Operating Temperature="-20°C ~ 80°C", Package / Case="3-SMD, Non-Standard", Supplier Part Number 1=490-1195-1-ND, Category="Crystals and Oscillators", ComponentLink1Description=http://www.murata.com/~/media/webrenewal/support/library/catalog/products/timingdevice/ceralock/p16e.ashx, ComponentLink1URL=http://www.murata.com/~/media/webrenewal/support/library/catalog/products/timingdevice/ceralock/p16e.ashx, DesignID=CSTCE8M00G55-R0, Features="Built in Capacitor", Height="0.031\" (0.80mm)", Impedance=-, Manufacturer Part Number=CSTCE8M00G55-R0, Mounting Type="Surface Mount", Packaging="Cut Tape (CT)", Pricing 1="1=0.46, 10=0.384, 50=0.3456, 100=0.3074, 500=0.29134, 1000=0.24595 (USD)", RoHS="RoHS Compliant", Size / Dimension="0.126\" L x 0.051\" W (3.20mm x 1.30mm)", Stock 1=11412, Supplier 1=Digi-Key, Type=Ceramic

## Via types
v1: diameter 0.508, hole 0.254, Top Layer to Bottom Layer, tented both sides, 20 vias
v2: diameter 0.508, hole 0.254, Top Layer to Bottom Layer, 3 vias
v3: diameter 0.635, hole 0.254, Top Layer to Bottom Layer, tented both sides, 2 vias

## Nets (pads, with @x,y where several pads share a name; then routed paths per layer and width w, separated by ;. In a path a pad name is that pad's centre, name@x,y a point inside that pad or via, vN(x,y) a via of type N, cw(c..) or ccw(c..) an arc to the next point about the centre after c; other vN are vias at no path point)
COL1: D2.1 D7.1 D12.1 D17.1 U1.18 | length 114.7
  Top Layer w0.254: v1(106.172,125.73) 106.172,127.254 cw(c108.585,127.254) 108.585,129.667 148.971,129.667 ccw(c148.971,130.433) 149.737,130.433 U1.18
  Bottom Layer w0.254: v1(106.172,125.73) 106.172,123.853 ccw(c106.2,123.853) D17.1 ccw(c106.2,121.384) 103.759,121.384 103.759,104.775 ; D2.1 cw(c106.2,69.116) 103.759,69.116 103.759,85.725 ; D7.1 103.759,85.725 ; D12.1 103.759,104.775 ; 103.759,85.725 103.759,104.775
COL2: D3.1 D8.1 D13.1 D18.1 U1.19 | length 96.1
  Top Layer w0.254: v1(125.222,125.222) 125.222,126.565 cw(c127.762,126.565) 127.762,129.105 149.225,129.105 149.55,129.105 ccw(c149.55,129.359) 149.657,129.129 ccw(c149.225,130.044) 150.237,130.044 U1.19
  Bottom Layer w0.254: v1(125.222,125.222) 125.222,123.853 ccw(c125.25,123.853) D18.1 ccw(c125.25,121.384) 122.809,121.384 122.809,104.775 ; D3.1 cw(c125.25,69.116) 122.809,69.116 122.809,85.725 ; D8.1 122.809,85.725 ; D13.1 122.809,104.775 ; 122.809,85.725 122.809,104.775
COL3: D4.1 D9.1 D14.1 D19.1 U1.20 | length 77.3
  Top Layer w0.254: v1(144.399,125.095) 144.399,126.111 cw(c146.939,126.111) 146.939,128.651 149.606,128.651 ccw(c149.606,129.782) 150.737,129.782 U1.20
  Bottom Layer w0.254: D4.1 cw(c144.3,69.116) 141.859,69.116 141.859,85.725 ; D9.1 141.859,85.725 ; D14.1@144.3,104.775 141.859,104.775 ; D19.1@144.3,123.825 ccw(c144.3,121.384) 141.859,121.384 141.859,104.775 ; v1(144.399,125.095) cw(c144.399,125.039) 144.455,125.039 D19.1 ; 141.859,85.725 141.859,104.775
COL4: D5.1 D10.1 D15.1 D20.1 U1.21 | length 83.2
  Top Layer w0.254: U1.21 151.237,130.322 ccw(c151.892,130.322) 151.892,129.667 160.782,129.667 cw(c160.782,127.127) 163.322,127.127 v1(163.322,125.476)
  Bottom Layer w0.254: v1(163.322,125.476) cw(c163.322,125.448) 163.35,125.448 D20.1 ccw(c163.35,121.384) 160.909,121.384 160.909,104.775 ; D5.1 cw(c163.35,69.116) 160.909,69.116 160.909,85.725 ; D10.1 160.909,85.725 ; D15.1 160.909,104.775 ; 160.909,85.725 160.909,104.775
COL5: D6.1 D11.1 D16.1 D21.1 U1.28 | length 99.7
  Top Layer w0.254: U1.28 163.556,134.513 cw(c163.556,133.477) 164.592,133.477 ccw(c165.354,133.477) 165.354,132.715 v2(167.005,132.715)
  Bottom Layer w0.254: v2(167.005,132.715) cw(c167.132,132.715) 167.132,132.842 174.475,132.842 cw(c174.475,124.917) 182.4,124.917 D21.1 ccw(c182.4,121.384) 179.959,121.384 179.959,104.775 ; D6.1@182.4,66.675 cw(c182.4,69.116) 179.959,69.116 179.959,85.725 ; D11.1@182.4,85.725 179.959,85.725 ; D16.1 179.959,104.775 ; 179.959,85.725 179.959,104.775
GND: C1.2 C2.2 C3.2 C4.2 C5.2 C6.2 C7.2 C8.2 C9.2 D1.1 D22.1 D23.1 J1.1 J1.8 J1.9 J1.16 J1.17 J1.18 J1.19 J1.20 J2.3 J2.5 U1.8 U1.23 U1.35 U1.47 U2.1 Y1.2 | length 5.6
  Top Layer w0.254: C4.2 142.944,133.546 ccw(c142.944,134.112) 143.259,133.642 143.281,133.642 144.652,135.013 U1.8
  other v1: 159.258,131.445 137.414,132.619 180.594,132.842 151.638,133.223 170.561,135.382 147.447,135.509 152.273,137.287 139.7,138.176 148.463,138.303 157.607,139.192 143.764,140.462 149.704,142.206 168.783,144.272 170.688,144.272 173.228,144.526
LED: R3.2 U1.10 | length 18.7
  Top Layer w0.254: R3.2 131.155,132.588 cw(c131.155,130.048) 132.951,131.844 132.987,131.808 ccw(c134.783,133.604) 134.783,131.064 142.12,131.064 145.06,134.004 145.728,134.004 U1.10
NetC8_1: C8.1 U1.6 Y1.1 | length 6.5
  Top Layer w0.254: C8.1 ccw(c139.592,135.217) 139.592,135.198 Y1.1 143.446,135.198 144.261,136.013 U1.6
NetC9_1: C9.1 U1.5 Y1.3 | length 6.3
  Top Layer w0.254: C9.1 141.186,138.271 ccw(c141.859,138.271) Y1.3 143.707,137.598 144.792,136.513 U1.5
NetD2_2: D2.2 SW1.2 | length 4.6
  Bottom Layer w0.254: D2.2 SW1.2
NetD3_2: D3.2 SW2.2 | length 4.6
  Bottom Layer w0.254: D3.2 SW2.2
NetD4_2: D4.2 SW3.2 | length 4.6
  Bottom Layer w0.254: D4.2 SW3.2
NetD5_2: D5.2 SW4.2 | length 4.6
  Bottom Layer w0.254: D5.2 SW4.2
NetD6_2: D6.2 SW5.2 | length 4.6
  Bottom Layer w0.254: D6.2@185.9,66.675 SW5.2
NetD7_2: D7.2 SW6.2 | length 4.6
  Bottom Layer w0.254: D7.2 SW6.2
NetD8_2: D8.2 SW7.2 | length 4.6
  Bottom Layer w0.254: D8.2 SW7.2
NetD9_2: D9.2 SW8.2 | length 4.6
  Bottom Layer w0.254: D9.2 SW8.2
NetD10_2: D10.2 SW9.2 | length 4.6
  Bottom Layer w0.254: D10.2 SW9.2
NetD11_2: D11.2 SW10.2 | length 4.6
  Bottom Layer w0.254: D11.2@185.9,85.725 SW10.2
NetD12_2: D12.2 SW11.2 | length 4.6
  Bottom Layer w0.254: D12.2 SW11.2
NetD13_2: D13.2 SW12.2 | length 4.6
  Bottom Layer w0.254: D13.2 SW12.2
NetD14_2: D14.2 SW13.2 | length 4.6
  Bottom Layer w0.254: D14.2@147.8,104.775 SW13.2
NetD15_2: D15.2 SW14.2 | length 4.6
  Bottom Layer w0.254: D15.2 SW14.2
NetD16_2: D16.2 SW15.2 | length 4.6
  Bottom Layer w0.254: D16.2 SW15.2
NetD17_2: D17.2 SW16.2 | length 4.6
  Bottom Layer w0.254: D17.2 SW16.2
NetD18_2: D18.2 SW17.2 | length 4.6
  Bottom Layer w0.254: D18.2 SW17.2
NetD19_2: D19.2 SW18.2 | length 4.6
  Bottom Layer w0.254: D19.2@147.8,123.825 SW18.2
NetD20_2: D20.2 SW19.2 | length 4.6
  Bottom Layer w0.254: D20.2 SW19.2
NetD21_2: D21.2 SW20.2 | length 4.6
  Bottom Layer w0.254: D21.2 SW20.2
NetD22_2: D22.2 R2.1 | length 1.6
  Top Layer w0.254: D22.2 R2.1
NetD23_2: D23.2 R3.1 | length 12.9
  Top Layer w0.254: D23.2 119.38,135.128 ccw(c121.92,135.128) 121.92,132.588 R3.1
NetSW21_3: SW21.3 SW21.4 U1.44 | length 40.7
  Top Layer w0.254: SW21.3 123.245,135.708 ccw(c124.714,135.708) 124.714,134.239 v2(135.128,134.239) ; U1.44 cw(c150.702,140.013) 149.257,140.252 ccw(c149.006,140.293) 149.26,140.294 149.26,140.581 cw(c149.514,140.581) 149.379,140.796 ccw(c149.244,141.011) 149.441,140.852 cw(c151.496,139.197) 151.329,141.83 ccw(c151.313,142.083) 151.553,141.998 ; 151.553,141.999 v2(151.638,142.24)
  Bottom Layer w0.254: v2(135.128,134.239) ccw(c135.128,138.049) 138.938,138.049 138.938,140.462 cw(c141.732,140.462) 141.732,143.256 150.622,143.256 cw(c150.622,142.24) v2(151.638,142.24)
nRESET: J2.10 R1.1 U1.7 | length 38.2
  Top Layer w0.254: U1.7 145.728,135.504 144.394,135.504 143.891,135.001 143.383,134.493 140.236,134.493 140.183,134.44 140.155,134.44 139.509,133.794 139.192,133.794 139.065,133.667 138.071,133.667 137.922,133.816 137.922,138.43 143.405,143.913 151.447,143.913 151.469,143.891 J2.10
ROW1: SW1.1 SW2.1 SW3.1 SW4.1 SW5.1 U1.27 | length 198.5
  Top Layer w0.254: SW1.1 SW2.1 SW3.1 SW4.1 SW5.1 195.58,64.135 ccw(c195.58,65.151) 196.596,65.151 ; U1.27 162.024,134.013 cw(c162.024,132.969) 163.068,132.969 ccw(c164.592,132.969) 163.545,131.862 ccw(c163.72,132.046) 163.72,131.792 165.608,131.792 193.954,131.792 193.957,131.792 cw(c193.956,129.149) 196.599,129.149 196.599,129.146 196.669,104.229 cw(c195.961,104.225) 196.669,104.225 196.669,86.868 cw(c192.532,86.868) 196.669,86.85 196.596,65.152
ROW2: SW6.1 SW7.1 SW8.1 SW9.1 SW10.1 U1.26 | length 177.4
  Top Layer w0.254: SW6.1 SW7.1 SW8.1 SW9.1 SW10.1 193.604,83.185 ccw(c193.604,85.725) 196.144,85.725 196.144,129.032 ccw(c193.839,129.032) 193.839,131.337 189.738,131.337 162.547,131.338 cw(c162.547,131.592) 162.398,131.386 cw(c163,132.216) 162.003,131.98 cw(c162.25,132.037) 161.996,132.025 ccw(c160.484,131.953) 161.975,132.215 161.975,132.216 ccw(c160.484,131.953) 161.891,132.511 ; U1.26 160.619,133.513 cw(c160.619,132.207) 161.882,132.54
ROW3: SW11.1 SW12.1 SW13.1 SW14.1 SW15.1 U1.25 | length 157.9
  Top Layer w0.254: SW11.1 SW12.1 SW13.1 SW14.1 SW15.1 194.564,102.235 ccw(c194.564,103.632) 195.629,102.728 ccw(c195.436,102.893) 195.69,102.894 195.69,128.878 ccw(c193.685,128.878) 193.685,130.883 162.209,130.883 cw(c162.209,131.137) 162.057,130.933 cw(c162.814,131.953) 161.544,131.953 ccw(c160.484,131.953) 160.484,133.013 U1.25
ROW4: SW16.1 SW17.1 SW18.1 SW19.1 SW20.1 U1.22 | length 109.2
  Top Layer w0.254: SW16.1 SW17.1 SW18.1 SW19.1 175.768,121.285 ; U1.22 cw(c151.506,131.407) 151.76,131.407 151.76,131.043 ccw(c153.153,131.043) 151.78,130.81 cw(c151.529,130.767) 151.783,130.777 ccw(c152.146,130.792) 152.147,130.429 173.228,130.429 cw(c173.228,127.889) 175.768,127.889 175.768,121.285 ; SW20.1 175.768,121.285
SWDCLK: J2.4 U1.37 | length 9.7
  Top Layer w0.254: U1.37 152.737,141.053 153.162,141.478 156.591,141.478 157.988,140.081 J2.4
SWDIO: J2.2 U1.34 | length 6.9
  Top Layer w0.254: U1.34 157.452,137.513 158.75,138.811 J2.2
USBD_N: D1.2 J1.5 J1.12 U1.32 | length 41.5
  Top Layer w0.254: U1.32 154.245,136.505 163.723,136.505 166.497,133.731 184.023,133.731 ; D1.2 183.957,133.665 184.023,133.731 ; J1.5@187.535,137.127 J1.5 ; J1.12 J1.12@188.385,138.656 ; v1(188.849,135.509) 187.071,133.731 184.023,133.731
  Bottom Layer w0.254: J1.12 188.385,138.477 187.611,137.703 187.611,137.275 J1.5 187.535,137.127 188.8,135.862 188.8,135.558 v1(188.849,135.509)
USBD_P: D1.3 J1.4 J1.13 R4.1 U1.33 | length 40
  Top Layer w0.254: U1.33 163.933,137.013 166.707,134.239 184.023,134.239 ; D1.3 183.957,134.305 184.023,134.239 ; J1.13@187.535,138.656 J1.13 187.535,138.477 188.309,137.703 188.309,137.275 J1.4 188.385,135.934 186.69,134.239 184.023,134.239
VCC: C1.1 C2.1 C3.1 C4.1 C6.1 C7.1 J2.1 R1.2 R2.2 R4.2 SW21.1 SW21.2 U1.9 U1.24 U1.36 U1.48 U2.2 U2.4 | length 127.2
  Top Layer w0.254: SW21.1 ccw(c128.748,136.804) 128.748,135.001 135.128,135.001 cw(c135.128,134.112) 136.017,134.112 136.017,132.715 ccw(c136.811,132.715) 136.811,131.921 R1.2 140.691,131.921 C4.1 142.36,131.946 144.918,134.504 145.728,134.504 U1.9 148.737,134.513 ccw(c148.737,135.763) v3(149.987,135.763) ; C1.1 146.97,141.663 146.97,141.066 147.228,140.808 147.228,140.022 U1.48 147.237,138.303 ccw(c149.777,138.303) 149.777,135.763 v3(149.987,135.763) ; C3.1 156.058,140.119 155.281,139.342 155.281,138.662 155.132,138.513 U1.36 152.527,138.513 ccw(c152.527,135.973) 149.987,135.973 v3(149.987,135.763) ; C2.1@156.231,131.513 U1.24 152.737,133.223 ccw(c150.197,133.223) 150.197,135.763 v3(149.987,135.763) ; U2.4 179.074,141.097 cw(c181.614,141.097) 181.614,143.637 194.373,143.637 cw(c194.373,142.049) R2.2 ccw(c195.961,139.89) 193.802,139.89 193.802,135.636 cw(c190.945,135.636) 190.945,132.779 R4.2
  Top Layer w0.5: J2.1 v3(167.513,138.811) 168.783,140.081 C7.1 C6.1 170.586,141.186 171.056,140.716 U2.2 U2.4
  Bottom Layer w0.254: 167.513,138.303 v3(167.513,138.811)
  Bottom Layer w0.5: v3(149.987,135.763) 164.973,135.763 ccw(c164.973,138.303) 167.513,138.303
VCC_USB: C5.1 D1.4 J1.2 J1.7 J1.10 J1.15 U2.3 | length 26.6
  Top Layer w0.5: C5.1 170.579,138.397 173.205,138.397 U2.3 174.893,138.416 177.292,136.017 182.245,136.017 ; D1.4 182.107,135.185 182.107,135.879 182.245,136.017 ; J1.2 J1.10 190.056,138.578 190.056,139.128 189.738,139.446 186.182,139.446 185.864,139.128 185.864,138.578 J1.15 J1.7 185.83,137.194 185.83,136.31 185.537,136.017 182.245,136.017
pads on no net: J1.3 J1.6 J1.11 J1.14 J2.6 J2.7 J2.8 J2.9 MT1.0 MT2.0 MT3.0 MT4.0 SW1.0 SW1.3 SW1.4 SW2.0 SW2.3 SW2.4 SW3.0 SW3.3 SW3.4 SW4.0 SW4.3 SW4.4 SW5.0 SW5.3 SW5.4 SW6.0 SW6.3 SW6.4 SW7.0 SW7.3 SW7.4 SW8.0 SW8.3 SW8.4 SW9.0 SW9.3 SW9.4 SW10.0 SW10.3 SW10.4 SW11.0 SW11.3 SW11.4 SW12.0 SW12.3 SW12.4 SW13.0 SW13.3 SW13.4 SW14.0 SW14.3 SW14.4 SW15.0 SW15.3 SW15.4 SW16.0 SW16.3 SW16.4 SW17.0 SW17.3 SW17.4 SW18.0 SW18.3 SW18.4 SW19.0 SW19.3 SW19.4 SW20.0 SW20.3 SW20.4 U1.1 U1.2 U1.3 U1.4 U1.11 U1.12 U1.13 U1.14 U1.15 U1.16 U1.17 U1.29 U1.30 U1.31 U1.38 U1.39 U1.40 U1.41 U1.42 U1.43 U1.45 U1.46

## Polygon pours and split planes (outlines as drawn)
GND on Bottom Layer "Bottom Layer-GND" (solid, remove dead copper, pour order 0): 101.219,44.196 ccw(c102.489,44.196) 102.489,42.926 197.231,42.926 ccw(c197.231,44.196) 198.501,44.196 198.501,52.324 198.501,144.526 ccw(c197.231,144.526) 197.231,145.796 102.489,145.796 ccw(c102.489,144.526) 101.219,144.526 101.219,52.324
GND on Top Layer "Top Layer-GND" (solid, remove dead copper, pour order 1): 101.219,44.196 ccw(c102.489,44.196) 102.489,42.926 197.231,42.926 ccw(c197.231,44.196) 198.501,44.196 198.501,52.324 198.501,144.526 ccw(c197.231,144.526) 197.231,145.796 102.489,145.796 ccw(c102.489,144.526) 101.219,144.526 101.219,52.324

## Silkscreen, mask and mechanical layers (free items; w line width, h text height)
Mechanical 1:
  the board outline again, w0.254